# EAGLE board pinoccio-test-middle (EAGLE 6.2)
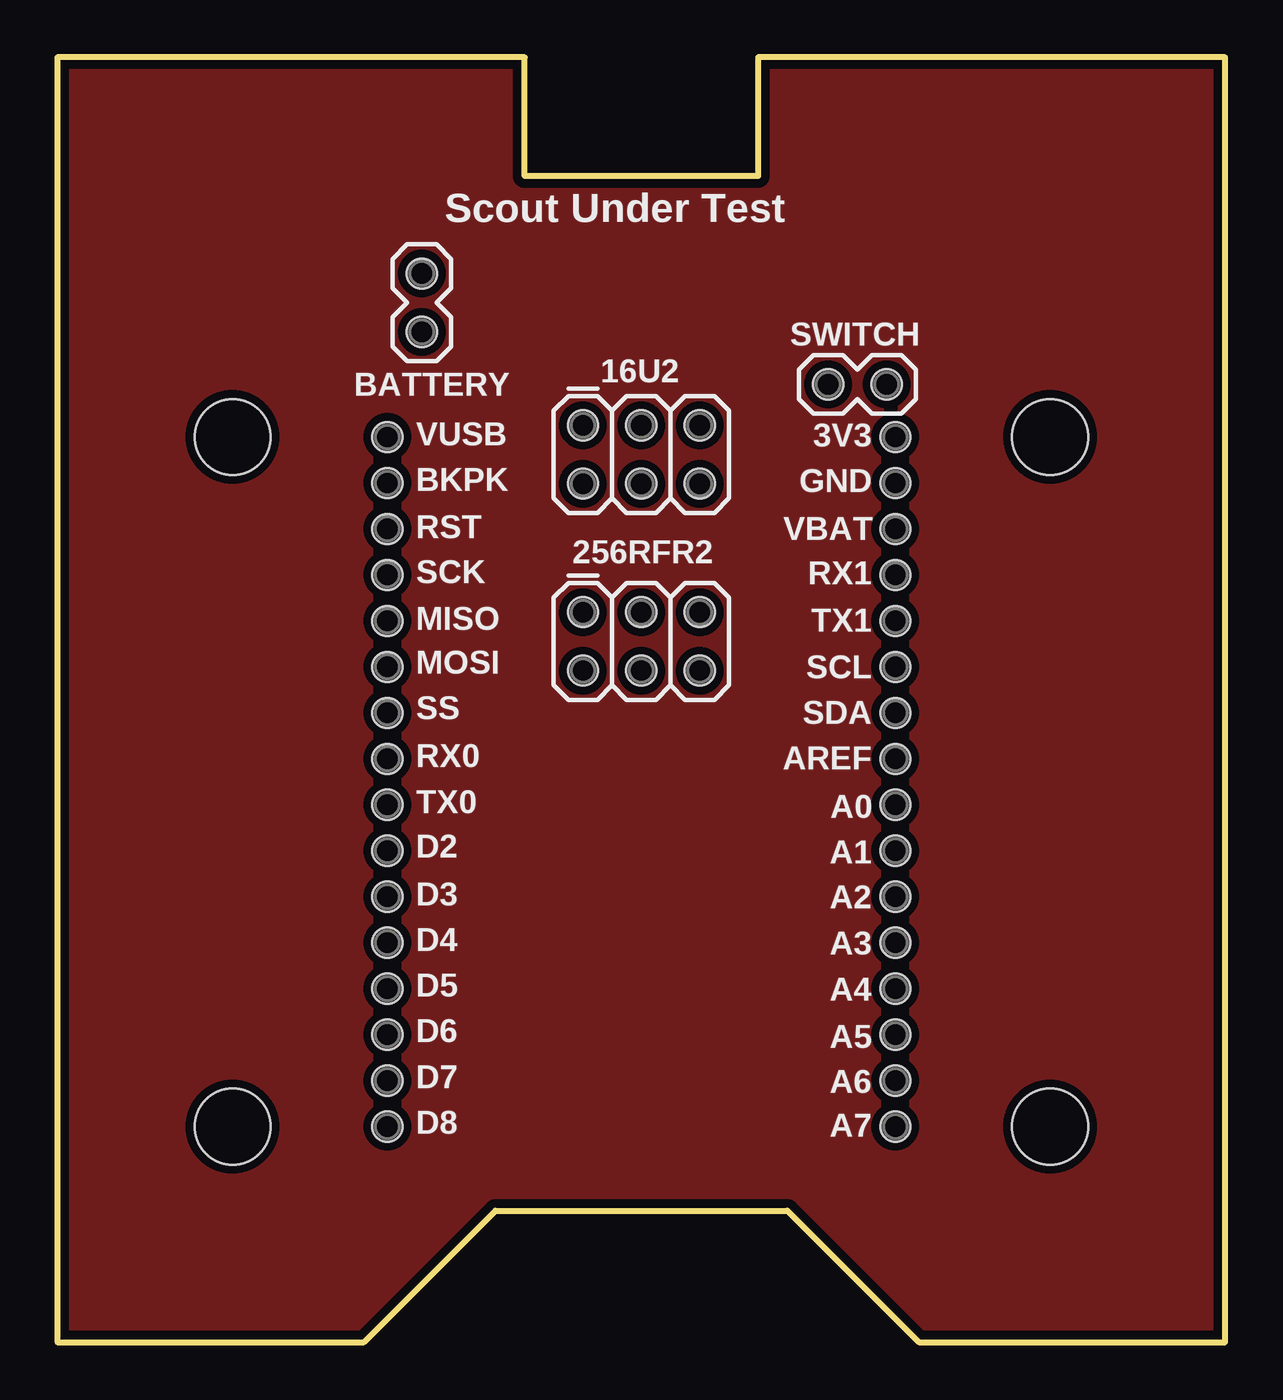
[diagram p0: board, top side]
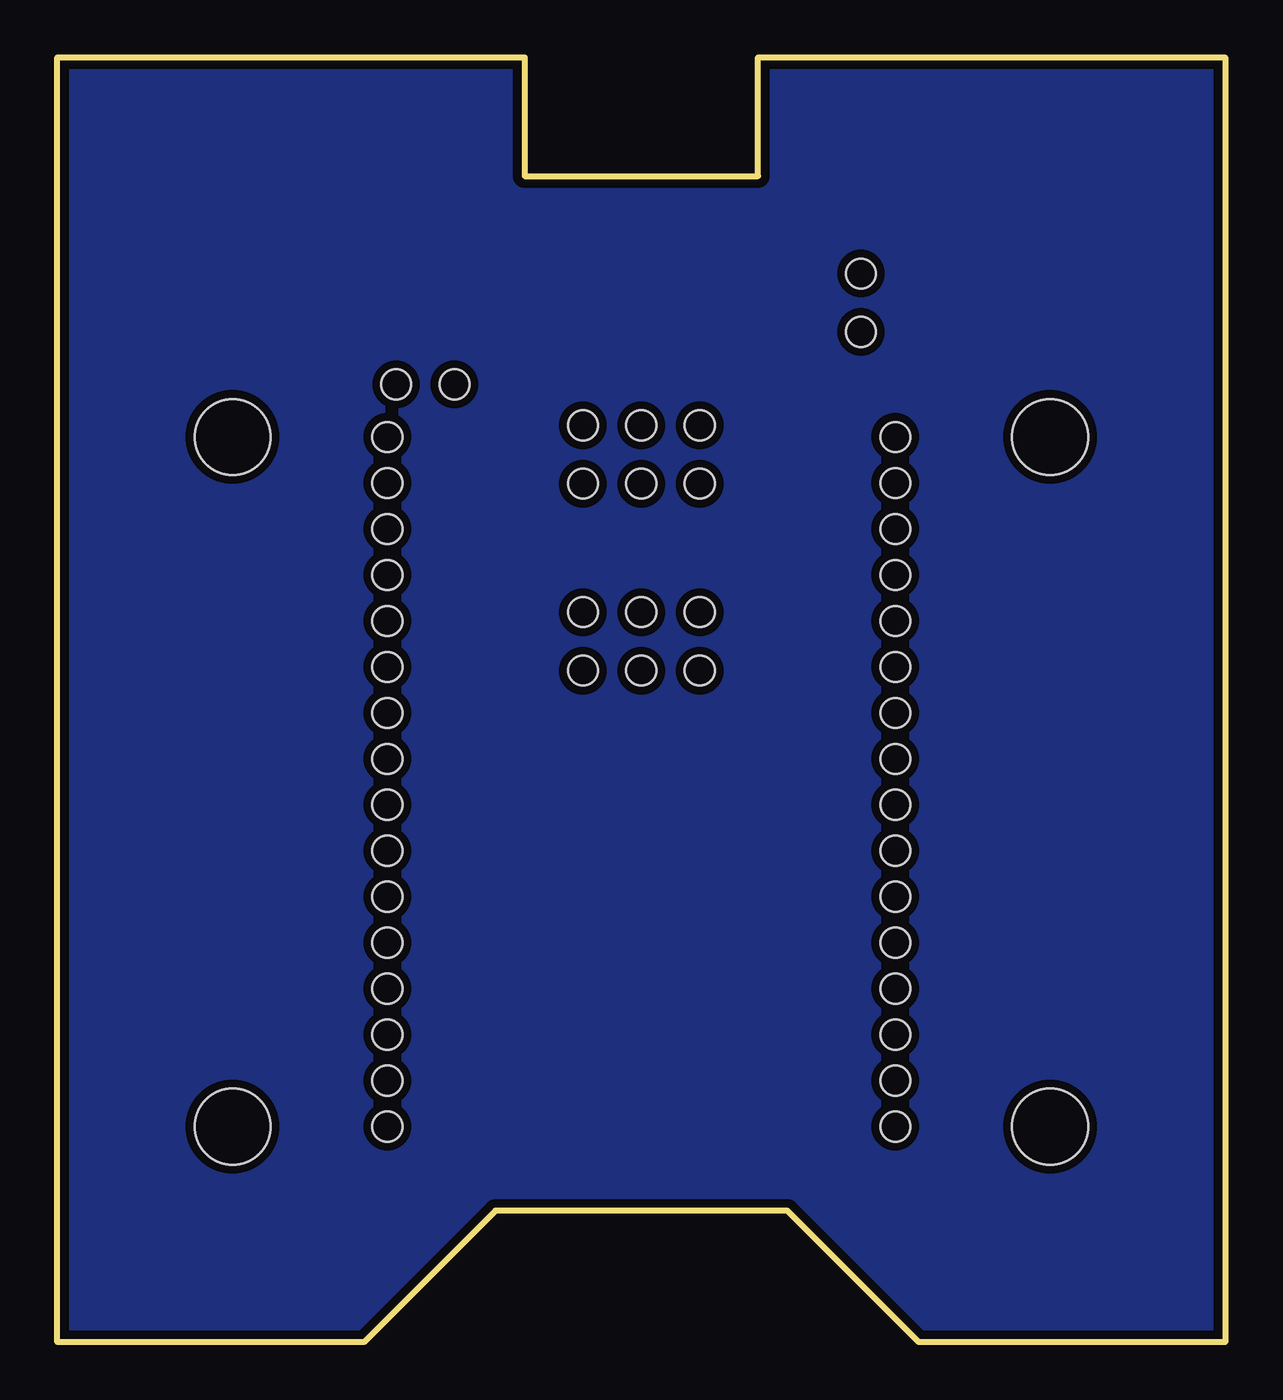
[diagram p1: board, bottom side, seen from below]

Size 50.8 x 55.88 mm. Coordinates in mm from the lower left corner, seen from the top.
Outline: 0,0 13.34,0 19.05,5.71 31.75,5.71 37.47,0 50.8,0 50.8,55.88 30.48,55.88 30.48,50.72 20.32,50.72 20.32,55.88 0,55.88 0,0
Copper layers (1*16): Top 0.0356mm / dielectric 1.5011mm / Bottom 0.0356mm
Design rules: minimum track width 6mil, minimum drill 13mil, track to track 6mil, track to pad 6mil, pad to pad 6mil, via to via 6mil, smd to smd 6mil, copper to edge 15mil, drill to drill 6mil, minimum pad ring 7mil, minimum via ring 7mil, stop-mask expansion 4mil, vias tented up to drill 16mil, thermal gap 10mil
Net classes: 0 Default: width 0.203 mm; 1 VCC: width 0.305 mm; 2 LEDPower: width 0.203 mm; 3 ButtonSignal: width 0.203 mm; 4 RF Antenna: width 0.305 mm; 5 GND: width 0.203 mm

## Footprints (pad centres in the part's own frame; a part is rotated, then mirrored left to right if it is on the bottom)
1X16_2MM_POGO-HOLES = hole 1.3: 0,0; 2,0; 4,0; 6,0; 8,0; 10,0; 12,0; 14,0; 16,0; 18,0; 20,0; 22,0; 24,0; 26,0; 28,0; 30,0
1X1_2MM_POGO-HOLES = hole 1.3: 0,0
STAND-OFF = hole 3.302: 0,0

## Placement (x,y rotation side)
E$1  [1X16_2MM_POGO-HOLES]  14.35,39.37 270 top
E$2  [1X16_2MM_POGO-HOLES]  36.45,39.37 270 top
E$3  [1X1_2MM_POGO-HOLES]  22.86,31.75 0 top
E$4  [1X1_2MM_POGO-HOLES]  25.4,31.75 0 top
E$5  [1X1_2MM_POGO-HOLES]  27.94,31.75 0 top
E$6  [1X1_2MM_POGO-HOLES]  27.94,29.21 0 top
E$7  [1X1_2MM_POGO-HOLES]  25.4,29.21 0 top
E$8  [1X1_2MM_POGO-HOLES]  22.86,29.21 0 top
E$9  [1X1_2MM_POGO-HOLES]  15.85,46.48 0 top
E$10  [1X1_2MM_POGO-HOLES]  15.85,43.94 0 top
E$11  [1X1_2MM_POGO-HOLES]  22.86,39.88 0 top
E$12  [1X1_2MM_POGO-HOLES]  25.4,39.88 0 top
E$13  [1X1_2MM_POGO-HOLES]  27.94,39.88 0 top
E$14  [1X1_2MM_POGO-HOLES]  27.94,37.34 0 top
E$15  [1X1_2MM_POGO-HOLES]  25.4,37.34 0 top
E$16  [1X1_2MM_POGO-HOLES]  22.86,37.34 0 top
E$17  [1X1_2MM_POGO-HOLES]  36.07,41.66 270 top
E$18  [1X1_2MM_POGO-HOLES]  33.53,41.66 270 top
JP7  STAND-OFF  [STAND-OFF]  43.18,39.37 0 top
JP8  STAND-OFF  [STAND-OFF]  7.62,39.37 0 top
JP9  STAND-OFF  [STAND-OFF]  7.62,9.37 0 top
JP10  STAND-OFF  [STAND-OFF]  43.18,9.37 0 top

## Library data of the parts
E$1-E$18 JP7-JP10 = Pinoccio

## Tracks (layer width: path | path; a pad name or v marks a point on that pad's centre or on a via)
S$2
  pour Top: 0.15,55.8 20.04,55.8 20.04,50.72 30.68,50.72 30.68,55.8 50.52,55.8 50.52,0.1 37.54,0.1 37.54,0.08 31.78,5.84 18.95,5.84 13.34,0.23 0.15,0.23
S$3
  pour Bottom: 0.41,55.47 0.41,0.33 13.41,0.33 19.02,5.94 31.95,5.94 37.69,0.2 50.57,0.2 50.57,55.65 30.66,55.65 30.66,50.47 20.04,50.47 20.04,55.47

## Text on the board
tPlace: Scout Under Test | SWITCH | BATTERY | 16U2 | 3V3 | VUSB | GND | BKPK | VBAT | RST | 256RFR2 | RX1 | SCK | TX1 | MISO | SCL | MOSI | SDA | SS | AREF | RX0 | A0 | TX0 | A1 | D2 | A2 | D3 | A3 | D4 | A4 | D5 | A5 | D6 | A6 | D7 | A7 | D8
tDocu: Pinoccio(tm) Scout Test Jig - Middle v1.0 | Design by: Eric Jennings for Pinoccio | http://pinocc.io | Licensed under CERN OHL v.1.1